# Altium PCB infantry chassis pcb.PcbDoc
Units mil, origin at the board's own origin, x right, y up, seen from the top; angles counter-clockwise.
Board outline 2933.72 x 1467.07 mil, 2 copper layers (Top Layer, Bottom Layer); 17 components, 22 nets, 81 pads, 9 vias.
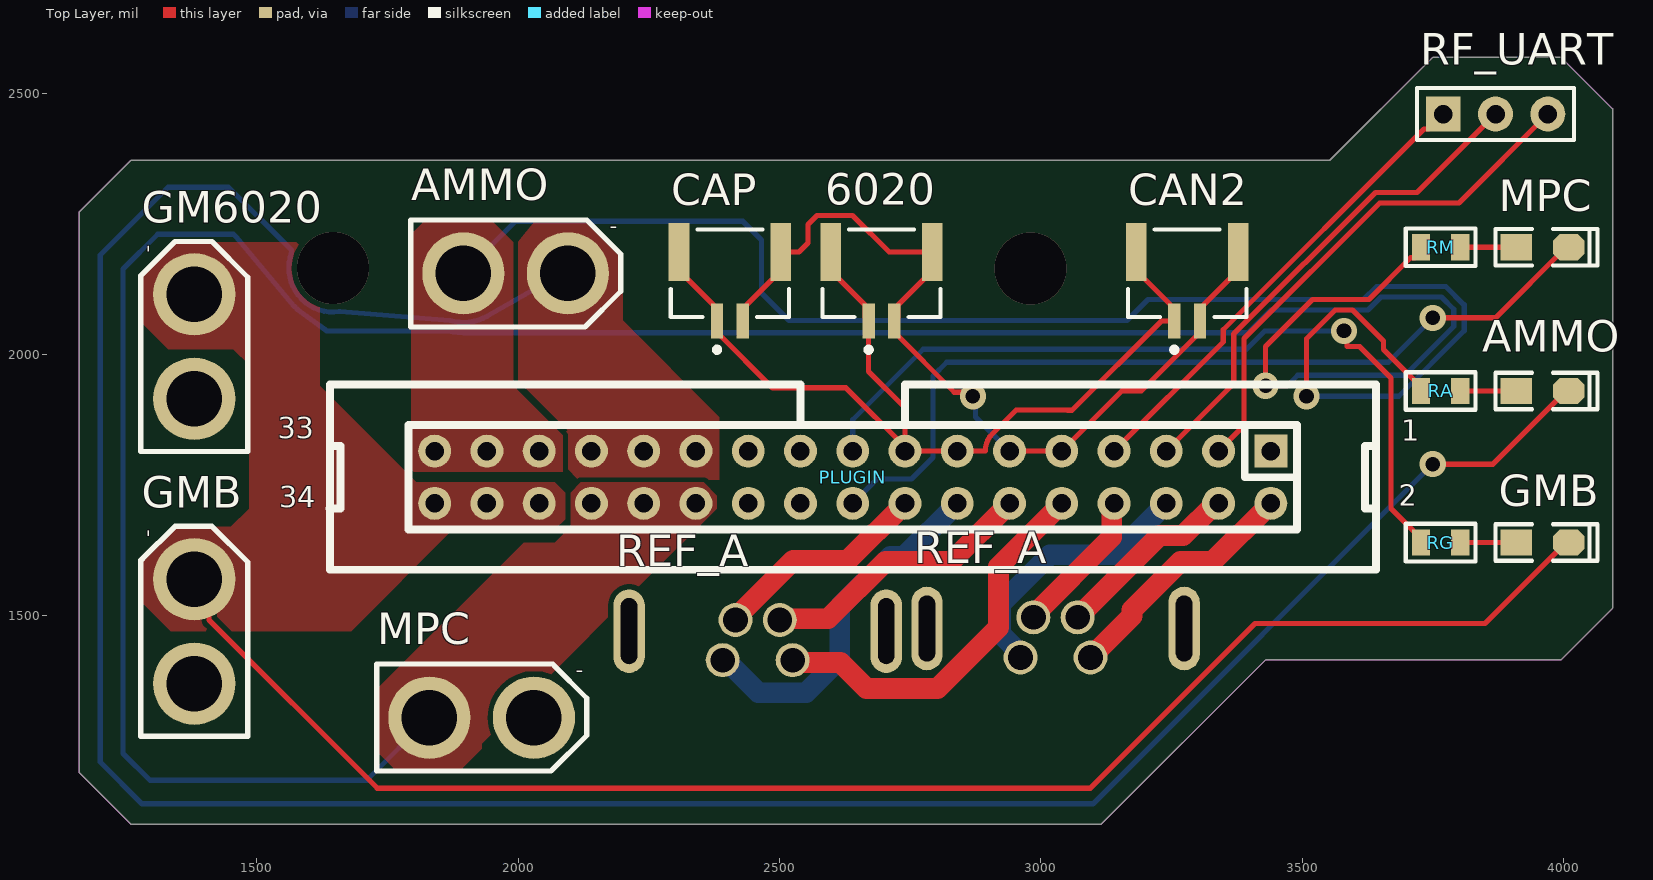
[diagram p0: Top Layer view]
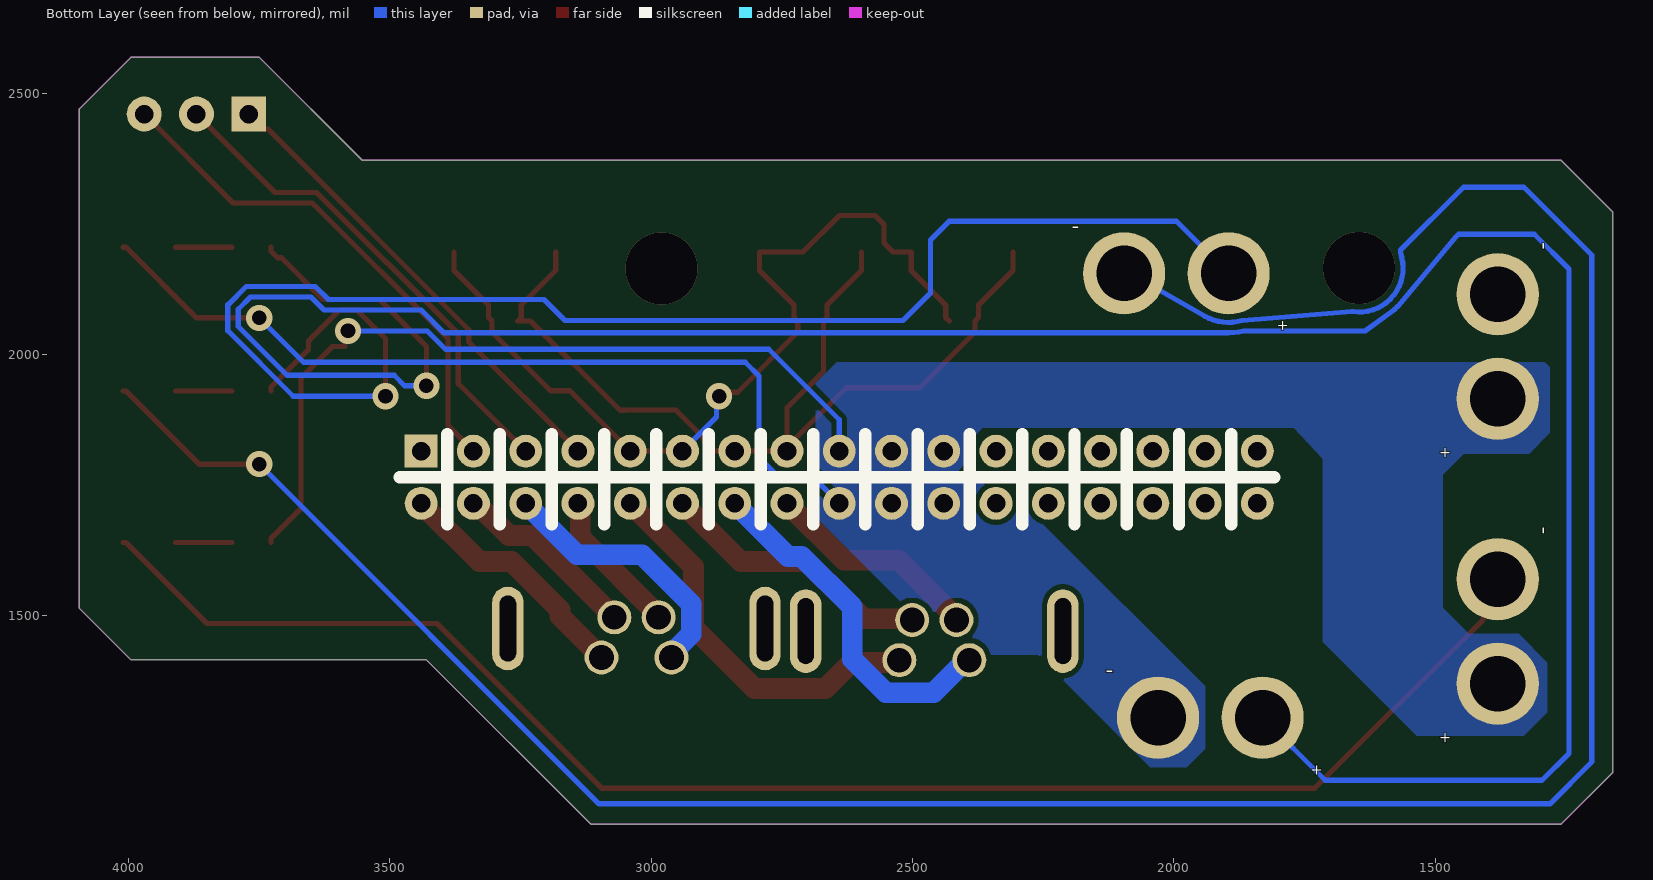
[diagram p1: Bottom Layer view, seen from below]

## Layer stack, top to bottom
Top Solder: solder mask 0.4, Solder Resist, Dk 3.5
Top Layer: signal copper 1.4
Dielectric 1: dielectric 12.6, FR-4, Dk 4.8
Bottom Layer: signal copper 1.4
Bottom Solder: solder mask 0.4, Solder Resist, Dk 3.5

## Board outline
1160.25,1199.63 1258.68,1101.2 3115.65,1101.2 3429.96,1415.51 3995.55,1415.51 4093.97,1513.94 4093.97,2469.84 3995.55,2568.27 3749.6,2568.27 3552.75,2371.42 1258.68,2371.42 1160.25,2272.99

## Design rules (kind name [scope] priority, off if disabled: settings)
Clearance [All] p1: gap=10 ignorepadtopadclearanceinfootprint=FALSE except(0: Arc-Hole Track-Hole SMDPad-Hole THPad-Hole Via-Hole Fill-Hole Poly-Hole Region-Hole Text-Hole)
PlaneConnect [All] p1: planeconnectstyle=Direct reliefexpansion=20 reliefentries=4 reliefconductorwidth=10 reliefairgap=10
PolygonConnect [All] p1: connectstyle=Direct reliefconductorwidth=10 reliefentries=4 polygonreliefangle="90 Angle" airgapwidth=10
RoutingVias [All] p1: holewidth=28 width=50 viastyle="Through Hole" minholewidth=28 minwidth=50 maxholewidth=28 maxwidth=50
SolderMaskExpansion [All] p1: expansion=4 istentingtop=FALSE
Width [All] p1: maxlimit=100 minlimit=10 preferedwidth=10
29 further rules are at their usual default settings.

## Classes and differential pairs
component class schematic: 6020 AMMO CAN2 CAP GM6020 GMB MPC PLUGIN RA REF_A RF_UART RG RM

## Components (designator, comment, footprint, x,y, rotation, side; value= is the part's Value field where it differs from the comment)
6020 "CAN2" JST-BM02B-GHS-TBT_V 2695,2130 r0 top
AMMO "红色" "LED 0805G" 3960,1930 r0 top
AMMO "XT PLUGIN" XT30-M 1995,2155 r0 top
CAN2 "CAN2" JST-BM02B-GHS-TBT_V 3280,2130 r0 top
CAP "CAN2" JST-BM02B-GHS-TBT_V 2405,2130 r0 top
GM6020 "XT PLUGIN" XT30-M 1380,2015 r90 top
GMB "红色" "LED 0805G" 3960,1640 r0 top
GMB "XT PLUGIN" XT30-M 1380,1470 r90 top
MPC "红色" "LED 0805G" 3960,2205 r0 top
MPC "XT PLUGIN" XT30-M 1930,1305 r0 top
PLUGIN "Header 2X11" IDC2.54-LI-2x17P 3440,1815 r180 top
RA "10K" "R 0805_L" 3765,1930 r0 top
REF_A "Referee_Air" "M8 Connector" 2458.07,1452.4 r0 top
REF_A "Referee_Air" "M8 Connector" 3028.07,1457.4 r0 top
RF_UART "HDR-1X3" HDR2.54-LI-3P 3870,2460 r0 top
RG "10K" "R 0805_L" 3765,1640 r0 top
RM "10K" "R 0805_L" 3765,2205 r0 top

## Footprints (in the part's own frame and the unit in brackets; to place one, negate y for a bottom-side part, rotate by r counter-clockwise, add the part's x,y. Pads: shape width x height; smd on the part's side, far side on the other; paste and mask are expansions set on the pad)
HDR2.54-LI-3P [mm] "排针，3脚"
  rect 1.7x1.7 hole 0.9: 1(-2.54,0)
  round 1.7 hole 0.9: 2(0,0) 3(2.54,0)
  silkscreen extent -3.81,-1.27 3.81,1.27, body extent -3.81,-1.27 3.81,1.27, height 8.5
IDC2.54-LI-2x17P [mm] "34P简易牛角座"
  rect 1.6x1.6 hole 0.9: 1(0,0)
  round 1.6 hole 0.9: 2(0,2.54) 3(2.54,0) 4(2.54,2.54) 5(5.08,0) 6(5.08,2.54) 7(7.62,0) 8(7.62,2.54) 9(10.16,0) 10(10.16,2.54) 11(12.7,0) 12(12.7,2.54) 13(15.24,0) 14(15.24,2.54) 15(17.78,0) 16(17.78,2.54) 17(20.32,0) 18(20.32,2.54) 19(22.86,0) 20(22.86,2.54) 21(25.4,0) 22(25.4,2.54) 23(27.94,0) 24(27.94,2.54) 25(30.48,0) 26(30.48,2.54) 27(33.02,0) 28(33.02,2.54) 29(35.56,0) 30(35.56,2.54) 31(38.1,0) 32(38.1,2.54) 33(40.64,0) 34(40.64,2.54)
  silkscreen extent -5.11,-3.23 45.75,5.77, body extent -5.08,-3.08 45.72,5.77, height 9.17
JST-BM02B-GHS-TBT_V [mm] "Connector, 2-Leads, Body 5.75x4.25mm, Pitch 1.25mm"
  rect 0.6x1.7 smd: 1(-0.625,-1.675) 2(0.625,-1.675)
  rect 1x2.8 smd: MP1(-2.475,1.675) MP2(2.475,1.675)
  silkscreen extent -2.88,-3.2 2.88,2.78, body extent -2.88,-2.17 2.87,2.78, height 4.21
"LED 0805G" [mil] "绿色0805LED                              淘宝ID:黄晶宝石"
  rect 60x50 smd: 1(-50,0)
  oct 60x50 smd: 2(50,0)
  silkscreen extent -90,-35 105,35, body extent -39,-25 39,25, height 32
"M8 Connector" [mm]
  round 1.65 hole 1.2: 0(-1.075,1) 1(1.075,1) 2(-1.7,-0.95) 3(1.7,-0.95)
  oval 1.524x4.064 hole 0.8 slot 3.2 at 90 deg: 4(-6.25,0.46) 5(6.25,0.46)
  body extent -6.25,-19.34 6.25,1.96, height 11.3
"R 0805_L" [mil] "1/8W贴片电阻"
  rect 35x50 smd: 1(-37.4,0) 2(37.4,0)
  silkscreen extent -67,-36 67,36, body extent -39,-25 39,25, height 20
XT30-M [mm]
  round 4 hole 2.7: 1(-2.54,0) 2(2.54,0)
  silkscreen extent -5.1,-2.6 5.11,2.6, body extent -5.18,-2.8 5.02,2.8, height 10.66

## Part data
6020 CAN2 CAP: library part CMP-2000-05957-1, "Disconnectable Crimp Style Connector, Pitch 1.25 mm, 1 x 2 Position, Height 4.05 mm, -25 to 85 degC, RoHS, Tape and Reel", Color=Natural, Manufacturer=JST-Sales-America-Inc., Package Description="Disconnectable Crimp Style Connector, Pitch 1.25 mm, 1 x 2 Position, Height 4.05 mm", Package Reference=BM02B-GHS-TBT, Category=Connectors,Interconnects, Connector Type=Header,Shrouded, Contact Finish=Tin, Contact Finish Thickness=-, Contact Mating Length=-, Contact Type=OuterShroudContact, Datasheet URL=http://www.jst-mfg.com/product/pdf/eng/eGH.pdf, Datasheet Version=05/2016, Family=RectangularConnectors-Headers,MalePins, Fastening Type=LockingRamp, Features=SolderRetention, Manufacturer URL=http://www.jst.com/home2.html, Mounting Technology=SurfaceMount, Mounting Type=SurfaceMount, Number of Positions=2, Number of Positions Loaded=All, Number of Rows=1, Packaging=Digi-Reel®, Pitch="0.049\"(1.25mm)", Row Spacing=-, Series=GH, Termination=Solder
AMMO GMB MPC: library part LED-SMD, "贴片LED", BOM名称=贴片LED, 学习资源=https://shop463601444.taobao.com, 版权归属="封装库来自淘宝 ID：黄晶宝石"
PLUGIN: library part "Header 17X2", "17*2P接插件", BOM名称=17*2P接插件, 学习资源=https://shop463601444.taobao.com, 版权归属="封装库来自淘宝 ID：黄晶宝石"
RA RG RM: library part R, "贴片电阻", BOM名称=贴片电阻, 封装库来自淘宝卖家 ID：黄晶宝石=其他店铺购入均为盗版，不享受售后技术支持服务，请立即申请退款, 版权归属="来自淘宝 ID：黄晶宝石", 联系售后=https://shop463601444.taobao.com
RF_UART: library part "Header 3", "3P接插件", BOM名称=3P接插件, 学习资源=https://shop463601444.taobao.com, 版权归属="封装库来自淘宝 ID：黄晶宝石"

## Via types
v1: diameter 50, hole 28, Top Layer to Bottom Layer, 7 vias
v2: diameter 137.8, hole 137.8, Top Layer to Bottom Layer, 1 vias
v3: diameter 137.79, hole 137.79, Top Layer to Bottom Layer, 1 vias

## Nets (pads, with @x,y where several pads share a name; then routed paths per layer and width w, separated by ;. In a path a pad name is that pad's centre, name@x,y a point inside that pad or via, vN(x,y) a via of type N, cw(c..) or ccw(c..) an arc to the next point about the centre after c; other vN are vias at no path point)
AMMO_DC: AMMO.1@1895,2155 PLUGIN.29 PLUGIN.31 PLUGIN.33 RA.1 | length 2969.3
  Top Layer w10: v1(3508.28,1920) 3508.28,2029.85 3563.43,2085 3596.57,2085 3655.83,2025.74 3655.83,2009.26 3727.6,1937.5 RA.1
  Bottom Layer w10: AMMO.1@1895,2155 1995,2255 2429.33,2255 2465.62,2218.71 2465.62,2117.62 2518.25,2065 3165,2065 3205,2105 3617.71,2105 3642.71,2130 3774.85,2130 3810,2094.85 3810,2045.15 3684.85,1920 v1(3508.28,1920)
AMMO_GND: AMMO.2 PLUGIN.23 PLUGIN.25 PLUGIN.27 | length 5311
  Top Layer w10: v1(3750,1790) 3865,1790 4005,1930 AMMO.2@4010,1930
  Bottom Layer w10: AMMO.2@2144.81,2189.81 1941.52,2073.61 cw(c1895,2155) 1868.79,2065 1658.84,2081.97 ccw(c1657.99,2072.01) 1657.95,2082.01 1657.28,2082.01 cw(c1645,2165) 1585.97,2105.39 1585.86,2105.5 cw(c1625.42,2145.42) 1585.68,2105.68 cw(c1645,2165) 1563.7,2185.7 1566.14,2195.3 ccw(c1556.14,2195.34) 1566.14,2195.39 1566.14,2199.48 1445.63,2320 1330,2320 1200,2190 1200,1220 1280,1140 3100,1140 v1(3750,1790)
CAN2_H: 6020.2 6020.MP2 CAN2.2 CAN2.MP2 CAP.2 CAP.MP2 PLUGIN.9 PLUGIN.11 | length 1692.3
  Top Layer w10: CAP.2 2436.42,2070.87 2436.42,2094.49 2502.44,2160.51 CAP.MP2 2537.13,2195.94 2554.39,2213.21 2554.39,2248.8 2571.66,2266.06 2639.65,2266.06 2709.77,2195.94 6020.MP2 2792.44,2160.51 2726.42,2094.49 2726.42,2070.87 6020.2 2719.61,2042.4 2834.35,1927.65 2862.35,1927.65 v1(2870,1920) ; PLUGIN.11 PLUGIN.9 3155.36,1930.37 3192.57,1930.37 3304.61,2042.4 CAN2.2 3311.42,2070.87 3311.42,2094.49 3377.44,2160.51 CAN2.MP2
  Bottom Layer w10: v1(2870,1920) 2875,1915 2875,1880 PLUGIN.11
CAN2_L: 6020.1 6020.MP1 CAN2.1 CAN2.MP1 CAP.1 CAP.MP1 PLUGIN.13 PLUGIN.15 | length 1864.4
  Top Layer w10: CAP.MP1 2307.56,2160.51 2373.58,2094.49 2373.58,2070.87 CAP.1 2380.39,2042.4 2486.77,1936.02 2627.26,1936.02 PLUGIN.15@2740,1823.28 ; 6020.MP1 2597.56,2160.51 2663.58,2094.49 2663.58,2070.87 6020.1 2670.39,1967.4 2740,1897.8 PLUGIN.15@2740,1823.28 ; CAN2.MP1 3182.56,2160.51 3248.58,2094.49 3248.58,2070.87 CAN2.1 3230.77,2064.06 3059.79,1893.08 3051.51,1893.08 3050.95,1893.64 2952.88,1893.64 2907.12,1847.88 ccw(c2940,1815) 2893.5,1815 PLUGIN.13 PLUGIN.15 PLUGIN.15@2740,1823.28
GMB_DC: GM6020.1 GMB.1@1380,1370 PLUGIN.17 PLUGIN.19 PLUGIN.21 RG.1 | length 1550.7
  Top Layer w10: v1(3580,2045) 3585.86,2039.14 3585.86,2015 3610,2015 3670,1955 3670,1705.1 3727.6,1647.5 RG.1
  Bottom Layer w10: PLUGIN.17 2640,1875 2775,2010 3393.28,2010 3428.28,2045 v1(3580,2045)
GMB_GND: GM6020.2 GMB.2 PLUGIN.30 PLUGIN.32 PLUGIN.34 | length 3019.7
  Top Layer w10: GMB.2@1380,1570 1408.22,1541.78 1408.22,1491.78 1730,1170 3095,1170 3410,1485 3850,1485 4005,1640 GMB.2@4010,1640
MPC_DC: MPC.1@1830,1305 PLUGIN.24 PLUGIN.26 PLUGIN.28 RM.1 | length 5173.1
  Top Layer w10: v1(3430,1940) 3430,2015 3520,2105 3627.6,2105 3707.6,2185 3715.1,2185 3727.6,2197.5 RM.1
  Bottom Layer w10: MPC.1@1830,1305 1710,1185 1295,1185 1243.44,1236.56 1243.44,2163.44 1310,2230 1455,2230 1460.86,2224.14 1565.07,2098.63 ccw(c1645,2165) 1583.69,2081.13 1630.47,2046.93 1633.1,2045 1866.07,2045 ccw(c1895,2155) 1895,2041.26 3396.26,2041.26 3440,2085 3625.99,2085 3650.99,2110 3766.57,2110 3790,2086.57 3790,2053.43 3696.57,1960 3491.72,1960 3471.72,1940 v1(3430,1940)
MPC_GND: MPC.2 PLUGIN.18 PLUGIN.20 PLUGIN.22 | length 1664.2
  Top Layer w10: v1(3750,2070) 3870,2070 4005,2205 MPC.2@4010,2205
  Bottom Layer w10: PLUGIN.18 2686.5,1761.5 2752.25,1761.5 2793.5,1802.75 2793.5,1958.5 2820,1985 3665,1985 v1(3750,2070)
NetAMMO_1: AMMO.1@3910,1930 RA.2 | length 107.6
  Top Layer w10: RA.2 AMMO.1@3910,1930
NetGMB_1: GMB.1@3910,1640 RG.2 | length 107.6
  Top Layer w10: RG.2 GMB.1@3910,1640
NetMPC_1: MPC.1@3910,2205 RM.2 | length 107.6
  Top Layer w10: RM.2 MPC.1@3910,2205
REFEREE_A1: PLUGIN.8 REF_A.0@2985.75,1496.77 | length 282.1
  Top Layer w40: REF_A.0@2985.75,1496.77 2985.75,1500.49 3135.6,1650.34 3135.6,1710.6 PLUGIN.8
REFEREE_A2: PLUGIN.4 REF_A.1@3070.39,1496.77 | length 360
  Top Layer w40: REF_A.1@3070.39,1496.77 3227.13,1653.5 3272.28,1653.5 3333.78,1715 PLUGIN.4
REFEREE_A3: PLUGIN.6 REF_A.2@2961.14,1420 | length 514.7
  Bottom Layer w40: REF_A.2@2961.14,1420 2961.14,1426.75 2923.27,1464.63 2923.27,1522.65 3017.24,1616.63 3141.63,1616.63 PLUGIN.6
REFEREE_A4: PLUGIN.2 REF_A.3@3095,1420 | length 473.8
  Top Layer w40: REF_A.3@3095,1420 3174.53,1499.53 3174.53,1510.76 3267.27,1603.5 3328.5,1603.5 PLUGIN.2
REFEREE_B1: PLUGIN.16 REF_A.0@2415.75,1491.77 | length 418.9
  Top Layer w40: REF_A.0@2415.75,1491.77 2415.75,1495.49 2526.45,1606.19 2631.19,1606.19 PLUGIN.16
REFEREE_B2: PLUGIN.12 REF_A.1@2500.39,1491.77 | length 532.1
  Top Layer w40: REF_A.1@2500.39,1491.77 2502.73,1494.1 2592.87,1494.1 2702.34,1603.57 2828.57,1603.57 PLUGIN.12
REFEREE_B3: PLUGIN.14 REF_A.2@2391.14,1415 | length 683.2
  Bottom Layer w40: REF_A.2@2391.14,1415 2396.97,1415 2459.45,1352.52 2550.88,1352.52 2615.08,1416.72 2615.08,1516.31 2712.23,1613.46 2738.46,1613.46 PLUGIN.14
REFEREE_B4: PLUGIN.10 REF_A.3@2525,1415 | length 752.6
  Top Layer w40: REF_A.3@2525,1415 2529.78,1410.22 2616.53,1410.22 2666.24,1360.51 2801.86,1360.51 2918.73,1477.38 2918.73,1593.73 PLUGIN.10
UART_GND: PLUGIN.7 RF_UART.1 | length 910.7
  Top Layer w10: PLUGIN.7 3348.95,2023.95 3348.95,2047.08 3733.4,2431.54 3741.54,2431.54 RF_UART.1
UART_RX: PLUGIN.3 RF_UART.3 | length 994.7
  Top Layer w10: PLUGIN.3 3388.95,1863.95 3388.95,2030.51 3648.43,2290 3800,2290 RF_UART.3
UART_Tx: PLUGIN.5 RF_UART.2 | length 952.7
  Top Layer w10: PLUGIN.5 3368.95,1943.95 3368.95,2038.8 3640.15,2310 3720,2310 RF_UART.2
pads on no net: PLUGIN.1 REF_A.4 REF_A.5
copper on no net:
  other v1: 2979.75,2164.42
  other v2: 2979.75,2164.42
  other v3: 1645,2165

## Polygon pours and split planes (outlines as drawn)
GMB_DC on Bottom Layer "GMB_DC_L02_P000" (solid, remove dead copper, pour order 0): 1285,1410 1340,1465 1435,1465 1485,1515 1485,1770 1445,1810 1320,1810 1280,1850 1280,1975 1290,1985 2645,1985 2685,1945 2685,1790 2665,1770 2420,1770 2390,1800 2390,1835 2365,1860 1770.09,1860 1715,1800 1715,1450 1535,1270 1330,1270 1285,1315
MPC_GND on Bottom Layer "MPC_GND_L02_P008" (solid, pour order 8): 2330,1755 2660,1755 2680,1735 2680,1685 2420,1425 2260,1425 2045,1210 1975,1210 1940,1245 1940,1365
no net on Bottom Layer "NONET_L02_P002" (solid, pour order 2): 2205,1925
no net on Bottom Layer "NONET_L02_P001" (solid, pour order 1): 2205,1925
AMMO_GND on Top Layer "AMMO_GND_Poly" (solid, pour order 15): 2000,2215 2000,1950 2095,1855 2090,1850 2090,1785 2115,1760 2385,1760 2385,1880 2200,2065 2200,2185 2125,2260 2035,2260
AMMO_DC on Top Layer "AMMO_GND_Poly" (solid, pour order 14): 1825,2260 1945,2260 1990,2215 1990,1940 2085,1845 2085,1775 1800,1775 1795,1780 1795,2230
AMMO_GND on Top Layer "AMMO_GND_L01_P012" (solid, pour order 12): 2385,2375
AMMO_GND on Top Layer "AMMO_GND_L01_P010" (solid, pour order 10): 2270,2155
MPC_DC on Top Layer "MPC_DC_L01_P007" (solid, pour order 7): 2120,1755 2355,1755 2380,1730 2380,1705 2100,1425 1930,1255 1930,1245 1890,1205 1765,1205 1730,1240 1730,1360 2010,1640 2070,1640 2100,1670 2100,1735
GMB_GND on Top Layer "GMB_GND_L01_P004" (solid, pour order 4): 1340,2215 1275,2150 1275,2065 1330,2010 1455,2010 1485,1980 1485,1705 1450,1670 1345,1670 1280,1605 1280,1525 1335,1470 1680,1470 1875,1665 2070,1665 2090,1685 2090,1735 2070,1755 1805,1755 1620,1940 1620,2170 1575,2215
no net on Top Layer "NONET_L01_P003" (solid, pour order 3): 2420,2575

## Keep-outs
Keep-Out Layer:
  the board outline again, w0.5

## Silkscreen, mask and mechanical layers (free items; w line width, h text height)
Mechanical 1:
  the board outline again, w47.24

## Text inside footprints (layer, text, board x,y; h text height)
AMMO: Bottom Overlay "-" at 2195,2232 h30; Bottom Overlay "+" at 1802.89,2045.76 h20; Top Overlay "-" at 2175,2232 h30
GM6020: Bottom Overlay "-" at 1303,2215 h30 r90; Bottom Overlay "+" at 1489.24,1822.89 h20 r90; Top Overlay "-" at 1303,2195 h30 r90
GMB: Bottom Overlay "-" at 1303,1670 h30 r90; Bottom Overlay "+" at 1489.24,1277.89 h20 r90; Top Overlay "-" at 1303,1650 h30 r90
MPC: Bottom Overlay "+" at 1737.89,1195.76 h20; Bottom Overlay "-" at 2130,1382 h30; Top Overlay "-" at 2110,1382 h30
PLUGIN: Top Overlay "33" at 1540,1840 h40; Top Overlay "34" at 1543,1708 h40; Top Overlay "1" at 3690,1835 h40; Top Overlay "2" at 3685,1710 h40